# EAGLE board sensor-astable-multivibrator-v2 (EAGLE 6.2)
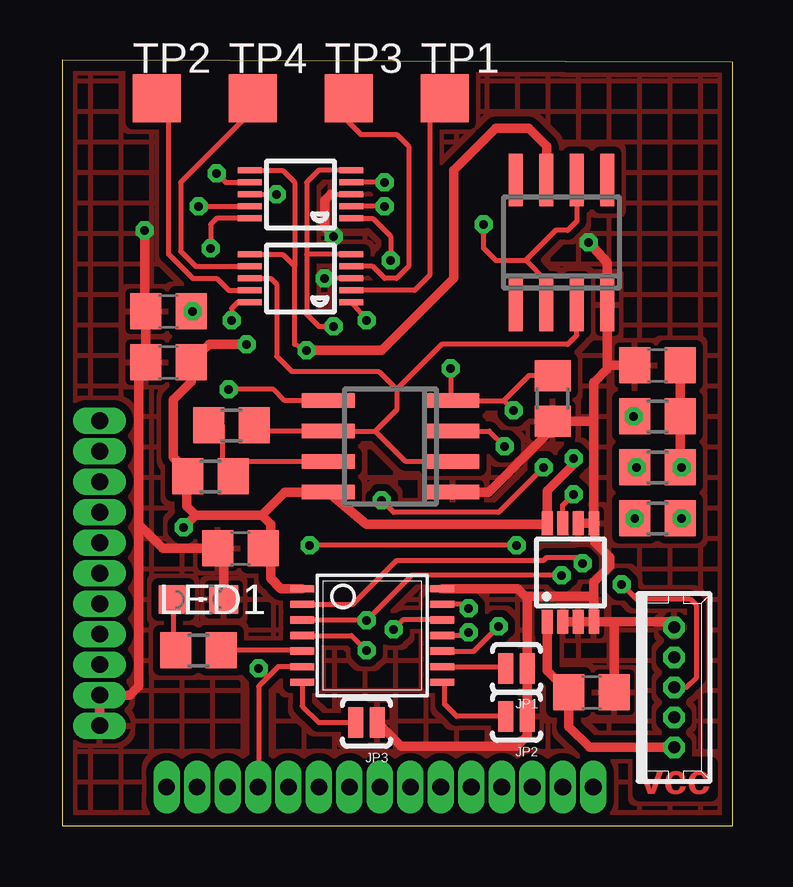
[diagram p0: board, top side]
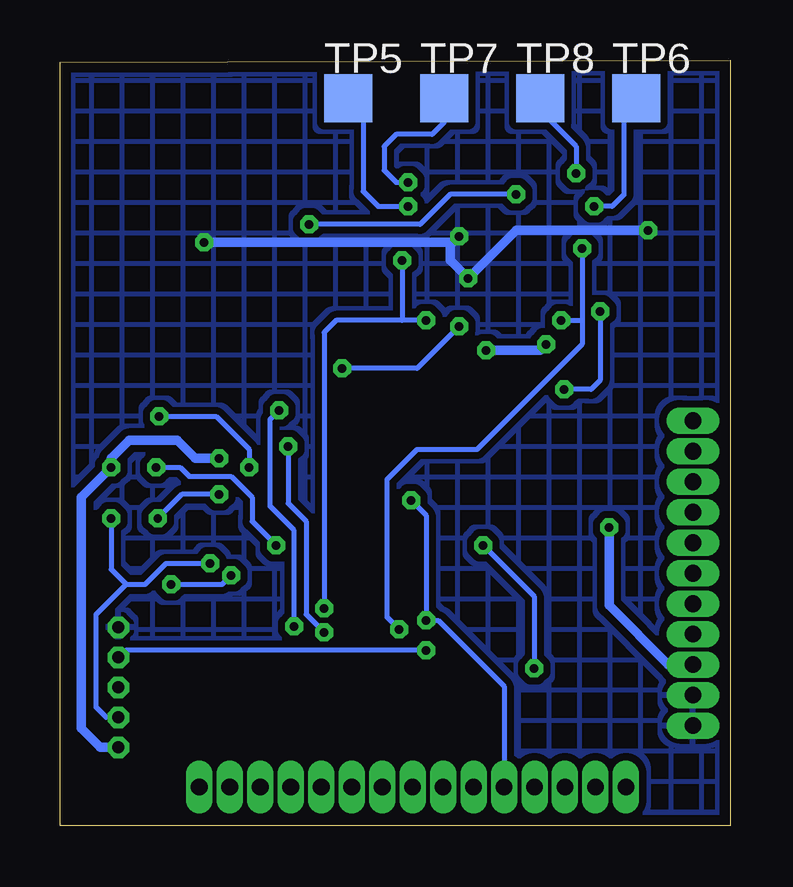
[diagram p1: board, bottom side, seen from below]

Size 27.93 x 31.9 mm. Coordinates in mm from the lower left corner, seen from the top.
Outline: 0,0 27.93,0 27.93,31.8 0,31.9 0,0
Copper layers (1*16): Top 0.018mm / dielectric 1.55mm / Bottom 0.018mm
Design rules: minimum track width 0.15mm, minimum drill 0.25mm, track to track 0.15mm, track to pad 0.15mm, pad to pad 0.15mm, via to via 0.15mm, smd to smd 0.15mm, copper to edge 0.45mm, drill to drill 0.3mm, minimum pad ring 0.2mm, minimum via ring 0.2mm, stop-mask expansion 0.1mm, vias tented up to drill 0.3mm, thermal gap 0.2mm

## Footprints (pad centres in the part's own frame; a part is rotated, then mirrored left to right if it is on the bottom)
C0805 = smd 1.3 x 1.5: 1 -0.95,0; 2 0.95,0
SO08 = smd 0.6 x 2.2: 1 -1.905,-2.6; 2 -0.635,-2.6; 3 0.635,-2.6; 4 1.905,-2.6; 5 1.905,2.6; 6 0.635,2.6; 7 -0.635,2.6; 8 -1.905,2.6
SJ_2S-NO = smd 0.635 x 1.27: 1 -0.45,0; 2 0.45,0
CHIPLED_0805 = smd 1.2 x 1.2: A 0,-1.05; C 0,1.05
R0805 = smd 1.3 x 1.5: 1 -0.95,0; 2 0.95,0
TP20SQ = smd 2 x 2: TP 0,0
JENNIC-FOOTPRINT-RB = drill 0.7 pad 1.016 long: P$16 2.731,-19.962; P$17 4.001,-19.962; P$18 5.271,-19.962; P$19 6.541,-19.962; P$20 7.811,-19.962; P$21 9.081,-19.962; P$22 10.351,-19.962; P$23 11.621,-19.962; P$24 12.891,-19.962; P$25 14.161,-19.962; P$26 15.431,-19.962; P$27 17.988,-17.171; P$28 17.988,-15.901; P$29 17.988,-14.631; P$30 17.988,-13.361; P$31 17.988,-12.091; P$32 17.988,-10.821; P$33 17.988,-9.551; P$34 17.988,-8.281; P$35 17.988,-7.011; P$36 17.988,-5.741; P$37 17.988,-4.471; P$38 17.988,-3.201; P$39 17.988,-1.931; P$40 17.988,-0.661; P$41 17.988,0.609
MSOP10 = smd 0.25 x 1: 1 -1,-2.113; 2 -0.5,-2.113; 3 0,-2.113; 4 0.5,-2.113; 5 1,-2.113; 6 1,2.113; 7 0.5,2.113; 8 0,2.113; 9 -0.5,2.113; 10 -1,2.113
MSOP8 = smd 0.45 x 1: 1 -0.975,-2.05; 2 -0.325,-2.05; 3 0.325,-2.05; 4 0.975,-2.05; 5 0.975,2.05; 6 0.325,2.05; 7 -0.325,2.05; 8 -0.975,2.05
TSSOP14 = smd 0.305 x 0.991: 1 -1.95,-2.918; 2 -1.3,-2.918; 3 -0.65,-2.918; 4 0,-2.918; 5 0.65,-2.918; 6 1.3,-2.918; 7 1.95,-2.918; 8 1.95,2.918; 9 1.3,2.918; 10 0.65,2.918; 11 0,2.918; 12 -0.65,2.918; 13 -1.3,2.918; 14 -1.95,2.918
53047-05-OCT = drill 0.5 pad 0.889 octagon: 1 2.5,0; 2 1.25,0; 3 0,0; 4 -1.25,0; 5 -2.5,0

## Placement (x,y rotation side)
C1  100n  [C0805]  4.42,21.43 180 top
C3  0,1µF  [C0805]  24.8,19.18 180 top
C4  0,1µF  [C0805]  22.05,5.55 0 top
C5  0,1µF  [C0805]  7.42,11.55 180 top
CT  10u  [C0805]  4.42,19.3 180 top
IC1  TLC555  [SO08]  13.68,15.8 90 top
JP1  [SJ_2S-NO]  18.93,6.55 180 top
JP2  [SJ_2S-NO]  18.93,4.55 180 top
JP3  [SJ_2S-NO]  12.68,4.3 180 top
LED1  [CHIPLED_0805]  5.67,9.43 270 top
R1  10k  [R0805]  20.43,17.8 90 top
R4  10k  [R0805]  24.8,17.05 0 top
R5  10k  [R0805]  24.8,14.93 0 top
R6  22  [R0805]  24.8,12.8 0 top
R9  27  [R0805]  5.67,7.3 180 top
RA  100k  [R0805]  7.05,16.68 0 top
RB  1k  [R0805]  6.17,14.55 0 top
THS4281  THS4281  [SO08]  20.8,24.3 0 top
TP1  TPTP20SQ  [TP20SQ]  15.93,30.3 0 top
TP2  TPTP20SQ  [TP20SQ]  3.92,30.3 0 top
TP3  TPTP20SQ  [TP20SQ]  11.93,30.3 0 top
TP4  TPTP20SQ  [TP20SQ]  7.92,30.3 0 top
TP5  TPTP20SQ  [TP20SQ]  15.93,30.3 0 bottom
TP6  TPTP20SQ  [TP20SQ]  3.92,30.3 0 bottom
TP7  TPTP20SQ  [TP20SQ]  11.93,30.3 0 bottom
TP8  TPTP20SQ  [TP20SQ]  7.92,30.3 0 bottom
U$1  CAPSENSE-BREAKOUT-I2C  [JENNIC-FOOTPRINT-RB]  21.52,19.6 270 top
U$2  ADG704  [MSOP10]  9.93,22.8 90 top
U$3  LTC6930-X.XX  [MSOP8]  21.18,10.55 0 top
U$4  ATTINY20  [TSSOP14]  12.92,7.92 270 top
U$5  ADG704  [MSOP10]  9.93,26.3 90 top
X2  PROGCON  [53047-05-OCT]  25.49,5.75 270 top

## Library data of the parts
C1 C3-C5 CT R1 R4-R6 R9 RA RB = rcl
IC1 THS4281 = linear
JP1-JP3 = SparkFun
LED1 = led
TP1-TP8 = testpad
U$1-U$5 = zittel
X2 = HedgehogLib

## Nets
(TPI)CLK: R6.2 U$4.2 X2.2
/RESET: U$4.4 X2.4
A0: U$2.1 U$4.13 U$5.1
A1: U$2.10 U$4.12 U$5.10
ADDR0: JP1.2 U$4.9
ADDR1: JP2.2 U$4.8
ADDR2: JP3.2 U$4.7
ANTENNA: IC1.2 IC1.6 RA.2 THS4281.3 U$2.8
BLUE: R9.1 U$4.5
ENABLE: IC1.4 R1.2 U$2.5 U$4.10 U$5.5
GND: C1.2 C3.2 C4.2 C5.2 CT.2 IC1.1 JP1.1 JP2.1 JP3.1 LED1.C R1.1 THS4281.4 U$1.P$25 U$1.P$26 U$2.3 U$3.2 U$3.3 U$3.4 U$3.5 U$3.6 U$4.14 U$5.3 X2.5
GUARD: THS4281.2 THS4281.6 U$5.8
N$1: IC1.7 RA.1 RB.2
N$2: TP1.TP U$2.2
N$3: C1.1 IC1.5
N$4: TP2.TP U$2.9
N$5: TP3.TP U$2.4
N$6: TP4.TP U$2.7
N$7: TP5.TP U$5.2
N$8: TP6.TP U$5.9
N$9: TP7.TP U$5.4
N$10: TP8.TP U$5.7
N$11: R6.1 U$3.7
N$12: LED1.A R9.2
OUT: IC1.3 U$4.11
SCL: R5.1 U$1.P$30 U$4.6
SDA/TPIDATA: R4.1 U$1.P$31 U$4.3 X2.3
VCC: C3.1 C4.1 C5.1 CT.1 IC1.8 R4.2 R5.2 RB.1 THS4281.7 U$1.P$24 U$2.6 U$3.1 U$3.8 U$4.1 U$5.6 X2.1

## Tracks (layer width: path | path; a pad name or v marks a point on that pad's centre or on a via)
(TPI)CLK  (via drill 0.35)
  Top 0.2: U$4.2 12.1,9.22 13.93,11.05 20.05,11.05 20.18,11.18 21.43,11.18 v21.68,10.93 | R6.2 v25.8,12.8
  Bottom 0.2: X2.2 26,4.5 26.43,4.92 26.43,8.8 25.18,10.05 | 25.18,10.05 24.38,10.05 23.5,10.93 v21.68,10.93 | v25.8,12.8 25.8,10.68 25.18,10.05
/RESET  (via drill 0.35)
  Top 0.2: U$4.4 12.06,7.92 v12.68,7.3
  Bottom 0.2: v12.68,7.3 25.2,7.3 X2.4
A0  (via drill 0.35)
  Top 0.2: U$5.1 12.93,25.3 13.68,24.55 v13.68,23.55 | U$2.1 v12.68,21.05 | v16.93,9.05 16.72,9.22 U$4.13
  Bottom 0.2: v13.68,23.55 13.68,21.05 | 13.68,21.05 16.43,21.05 16.93,20.55 v16.93,9.05 | v12.68,21.05 13.68,21.05
A1  (via drill 0.35)
  Top 0.2: U$5.10 6.42,25.3 6.17,25.05 v6.17,24.05 | U$2.10 7.3,21.8 7.05,21.55 v7.05,21.05 | U$4.12 14.2,8.57 v13.8,8.18
  Bottom 0.2: v6.17,24.05 6.17,21.05 | 6.17,21.05 6.17,20.05 10.55,15.68 13.05,15.68 14.3,14.43 14.3,8.68 v13.8,8.18 | v7.05,21.05 6.17,21.05
ADDR0
  Top 0.2: U$4.9 18.41,6.62 JP1.2
ADDR1
  Top 0.2: JP2.2 16.43,4.55 15.93,5.05 15.93,5.88 U$4.8
ADDR2
  Top 0.2: U$4.7 10,4.98 10.68,4.3 JP3.2
ANTENNA
  Top 0.2: 13.04,16.43 IC1.6 9.79,16.43 8.18,16.43 RA.2 | IC1.2 14.31,15.17 13.04,16.43 | U$2.8 8.68,22.8 8.93,22.55 8.93,19.55 9.55,18.93 13.18,18.93 13.93,18.18 | THS4281.3 21.44,20.44 21.05,20.05 15.8,20.05 13.93,18.18 | 13.93,18.18 13.93,17.32 13.04,16.43
BLUE
  Top 0.2: U$4.5 9.71,7.27 9.68,7.3 R9.1
ENABLE  (via drill 0.35)
  Top 0.2: U$5.5 10.68,27.3 10.18,26.8 10.18,23.8 | 10.18,23.8 10.18,21.3 10.68,20.8 v11.3,20.8 | U$2.5 10.18,23.8 | 18.39,17.71 IC1.4 16.18,17.71 v16.18,19.05 | U$4.10 17.14,7.27 v18.18,8.3 | R1.2 19.44,18.75 18.39,17.71 | v18.8,17.3 18.39,17.71
  Bottom 0.2: v11.3,20.8 13.05,19.05 v16.18,19.05 | v18.18,8.3 18.18,12.3 19.18,13.3 19.18,16.93 v18.8,17.3
GND  (via drill 0.35)
  Top 0.2: U$2.3 v10.93,22.8 | 19.38,9.48 19.32,9.55 | 6.72,11.38 6.55,11.55 C5.2 | 22.15,18.48 22.18,18.5 | 3.17,19 CT.2 | 3.42,21.35 C1.2 | U$3.5 22.18,12.6 | 11.18,26.3 U$5.3
  Top 0.4: C1.2 CT.2 | U$4.14 18.98,9.87 19.38,9.48 JP1.1 JP2.1 19.38,3.75 18.93,3.3 14.12,3.3 JP3.1 | U$3.2 U$3.3 U$3.4 | U$3.4 22.15,9.55 | U$3.6 U$3.5 22.15,16.8 | X2.5 25.25,8.5 U$3.4 | 19.32,9.55 22.15,9.55 | C5.2 4.17,11.55 3.17,12.55 | 3.17,12.55 3.17,19 | LED1.C 6.72,11.38 | IC1.1 17.77,13.9 20.23,16.35 20.43,16.35 R1.1 22.1,16.85 22.15,16.8 | v21.93,24.3 22.71,23.46 THS4281.4 22.71,19.3 | 22.15,16.8 22.15,18.48 | v3.42,24.8 3.42,21.35 | U$1.P$26 U$1.P$25 2.81,5.44 3.17,5.8 3.17,12.55 | 22.18,12.6 22.18,11.8 22.8,11.18 22.8,10.8 22.15,10.15 22.15,9.55 | U$3.4 23,8.5 C4.2 | v11.3,24.55 10.93,24.93 10.93,26.05 11.18,26.3 | 22.71,19.3 22.71,19.03 22.18,18.5 | C3.2 22.83,19.18 22.71,19.3
  Bottom 0.4: v3.42,24.8 8.93,24.8 v10.93,22.8 11.68,23.55 11.68,24.3 | v11.3,24.55 11.55,24.3 11.68,24.3 | 11.68,24.3 v21.93,24.3
  pour Bottom (isolate 0.3, hatched): 0.3,31.8 27.93,31.8 27.93,0.3 0.3,0.3
  pour Top (isolate 0.3, hatched): 0.3,31.68 27.93,31.8 27.93,0 0.3,0
GUARD  (via drill 0.35)
  Top 0.2: U$5.8 v8.93,26.3 | v17.55,25.05 17.55,24.05 18.05,23.55 19.3,23.55 | 19.3,23.55 20.16,22.69 THS4281.2 | THS4281.6 21.44,25.19 21.05,24.8 20.55,24.8 19.3,23.55
  Bottom 0.2: v8.93,26.3 11.68,26.3 12.93,25.05 v17.55,25.05
N$1
  Top 0.2: IC1.7 7.62,15.17 | 7.62,15.17 RB.2 | 7.62,15.17 7.62,15.05 6.67,15.05 6.67,16.68 RA.1
N$2
  Top 0.2: TP1.TP 15.3,29.68 15.3,22.93 14.68,22.3 U$2.2
N$3  (via drill 0.35)
  Top 0.2: IC1.5 9.27,17.71 8.8,18.18 v6.92,18.18 | C1.1 v5.42,21.43
  Bottom 0.2: v5.42,21.43 5.42,18.55 5.8,18.18 v6.92,18.18
N$4
  Top 0.2: U$2.9 6.92,22.3 6.42,22.8 5.42,22.8 4.42,23.8 4.42,29.68 3.92,29.68 TP2.TP
N$5
  Top 0.2: U$2.4 12.93,23.3 13.43,22.8 13.93,22.8 14.43,23.3 14.43,28.3 13.93,28.8 12.43,28.8 11.93,29.3 TP3.TP
N$6
  Top 0.2: U$2.7 5.55,23.3 4.92,23.93 4.92,26.8 7.8,29.68 7.8,29.43 TP4.TP
N$7  (via drill 0.35)
  Top 0.2: v13.43,25.8 U$5.2
  Bottom 0.2: TP5.TP 15.3,29.93 15.3,26.43 14.68,25.8 v13.43,25.8
N$8  (via drill 0.35)
  Top 0.2: v5.67,25.8 U$5.9
  Bottom 0.2: v5.67,25.8 4.92,25.8 4.42,26.3 4.42,29.68 TP6.TP
N$9  (via drill 0.35)
  Top 0.2: v13.43,26.8 U$5.4
  Bottom 0.2: v13.43,26.8 13.93,26.8 14.43,27.3 14.43,28.3 13.93,28.8 12.43,28.8 11.93,29.3 TP7.TP
N$10  (via drill 0.35)
  Top 0.2: v6.42,27.18 6.8,26.8 U$5.7
  Bottom 0.2: v6.42,27.18 6.42,28.3 7.8,29.68 7.8,29.74 7.74,29.8 TP8.TP
N$11  (via drill 0.35)
  Top 0.2: U$3.7 20.85,13.35 v21.3,13.8
  Bottom 0.2: v21.3,13.8 22.85,13.8 R6.1
  other vias: 23.85,12.8
N$12
  Top 0.2: LED1.A 4.62,7.4 R9.2
OUT  (via drill 0.35)
  Top 0.2: IC1.3 17.79,16.43 v18.43,15.8 | v16.93,8.05 16.8,7.92 U$4.11
  Bottom 0.2: v18.43,15.8 18.43,13.43 17.68,12.68 17.68,8.8 v16.93,8.05
SCL  (via drill 0.35)
  Top 0.2: U$4.6 9,6.62 8.55,6.17 | 8.55,6.17 8.18,5.8 8.18,1.63 U$1.P$30 | R5.1 23.93,15.05 v23.93,14.93 | v8.18,6.55 8.55,6.17 | v18.93,11.68 v10.3,11.68
  Bottom 0.2: v8.18,6.55 8.18,9.55 v10.3,11.68 | v23.93,14.93 22.93,14.93 22.55,14.55 20.8,14.55 19.93,13.68 19.93,12.68 v18.93,11.68
SDA/TPIDATA  (via drill 0.35)
  Top 0.2: X2.3 26,5.75 26.43,6.17 26.43,9.18 26.18,9.43 23.93,9.43 v23.3,10.05 | v23.8,17.05 R4.1 | U$4.3 12.7,8.57 v12.68,8.55 14.55,10.43 v20.8,10.43 | v20.05,14.93 18.18,13.05 13.8,13.05 v13.3,13.55
  Bottom 0.2: U$1.P$31 9.43,5.8 12.18,8.55 v12.68,8.55 12.68,12.93 v13.3,13.55 | v23.3,10.05 21.18,10.05 v20.8,10.43 | v23.8,17.05 21.43,17.05 20.05,15.68 v20.05,14.93
VCC  (via drill 0.35)
  Top 0.2: 7.67,27.3 U$5.6 9.18,27.3 9.68,26.8 9.68,23.3 | U$2.6 9.18,23.8 9.68,23.3 | v10.18,19.8 9.68,20.05 9.68,23.3 | 5.17,14.5 RB.1 | U$3.8 20.2,12.45 20.05,12.55 | C5.1 8.68,11.25 | R5.2 26.18,14.88 | 5.38,18.5 CT.1 | 20.18,26.54 THS4281.7
  Top 0.4: RB.1 5.05,14.93 4.62,15.35 4.62,17.75 5.38,18.5 | C3.1 R4.2 R5.2 | U$4.1 9.11,9.87 8.68,10.3 8.68,11.25 8.68,12.55 8.3,12.93 | 8.3,12.93 5.55,12.93 | 5.55,12.93 5.17,13.3 5.17,14.5 | 8.3,12.93 9.27,13.9 IC1.8 12.67,12.55 20.05,12.55 | U$3.1 20.2,6.45 C4.1 21.1,4.12 21.97,3.25 X2.1 | 26.18,14.88 v25.8,14.93 | v10.18,19.8 13.3,19.8 16.3,22.8 16.3,27.3 18.05,29.05 19.43,29.05 20.18,28.3 20.18,26.54 | CT.1 6.12,20.05 v7.67,20.05 | v5.05,12.43 5.55,12.93 | U$3.8 20.2,13.95 21.3,15.05 v21.3,15.3
  Bottom 0.4: v10.18,19.8 7.92,19.8 v7.67,20.05 | v21.3,15.3 22.3,15.3 23.05,16.05 25.05,16.05 25.8,15.3 v25.8,14.93 27.05,13.68 27.05,4.05 26.25,3.25 X2.1 | U$1.P$24 2.58,6.71 5.05,9.18 v5.05,12.43

## Text on the board
Top: vcc